# Altium PCB Rackmount_DSP.PcbDoc (part 13 of 24)
Units mil, origin at the board's own origin, x right, y up, seen from the top; angles counter-clockwise.
Board outline 10629.92 x 8267.72 mil, 4 copper layers (Top Layer, Mid Layer 1, Mid Layer 2, Bottom Layer), stack 36.2 mil thick; 4500 components, 1565 nets, 9765 pads, 3289 vias.
Unrouted connection lines stored in the file: 1.
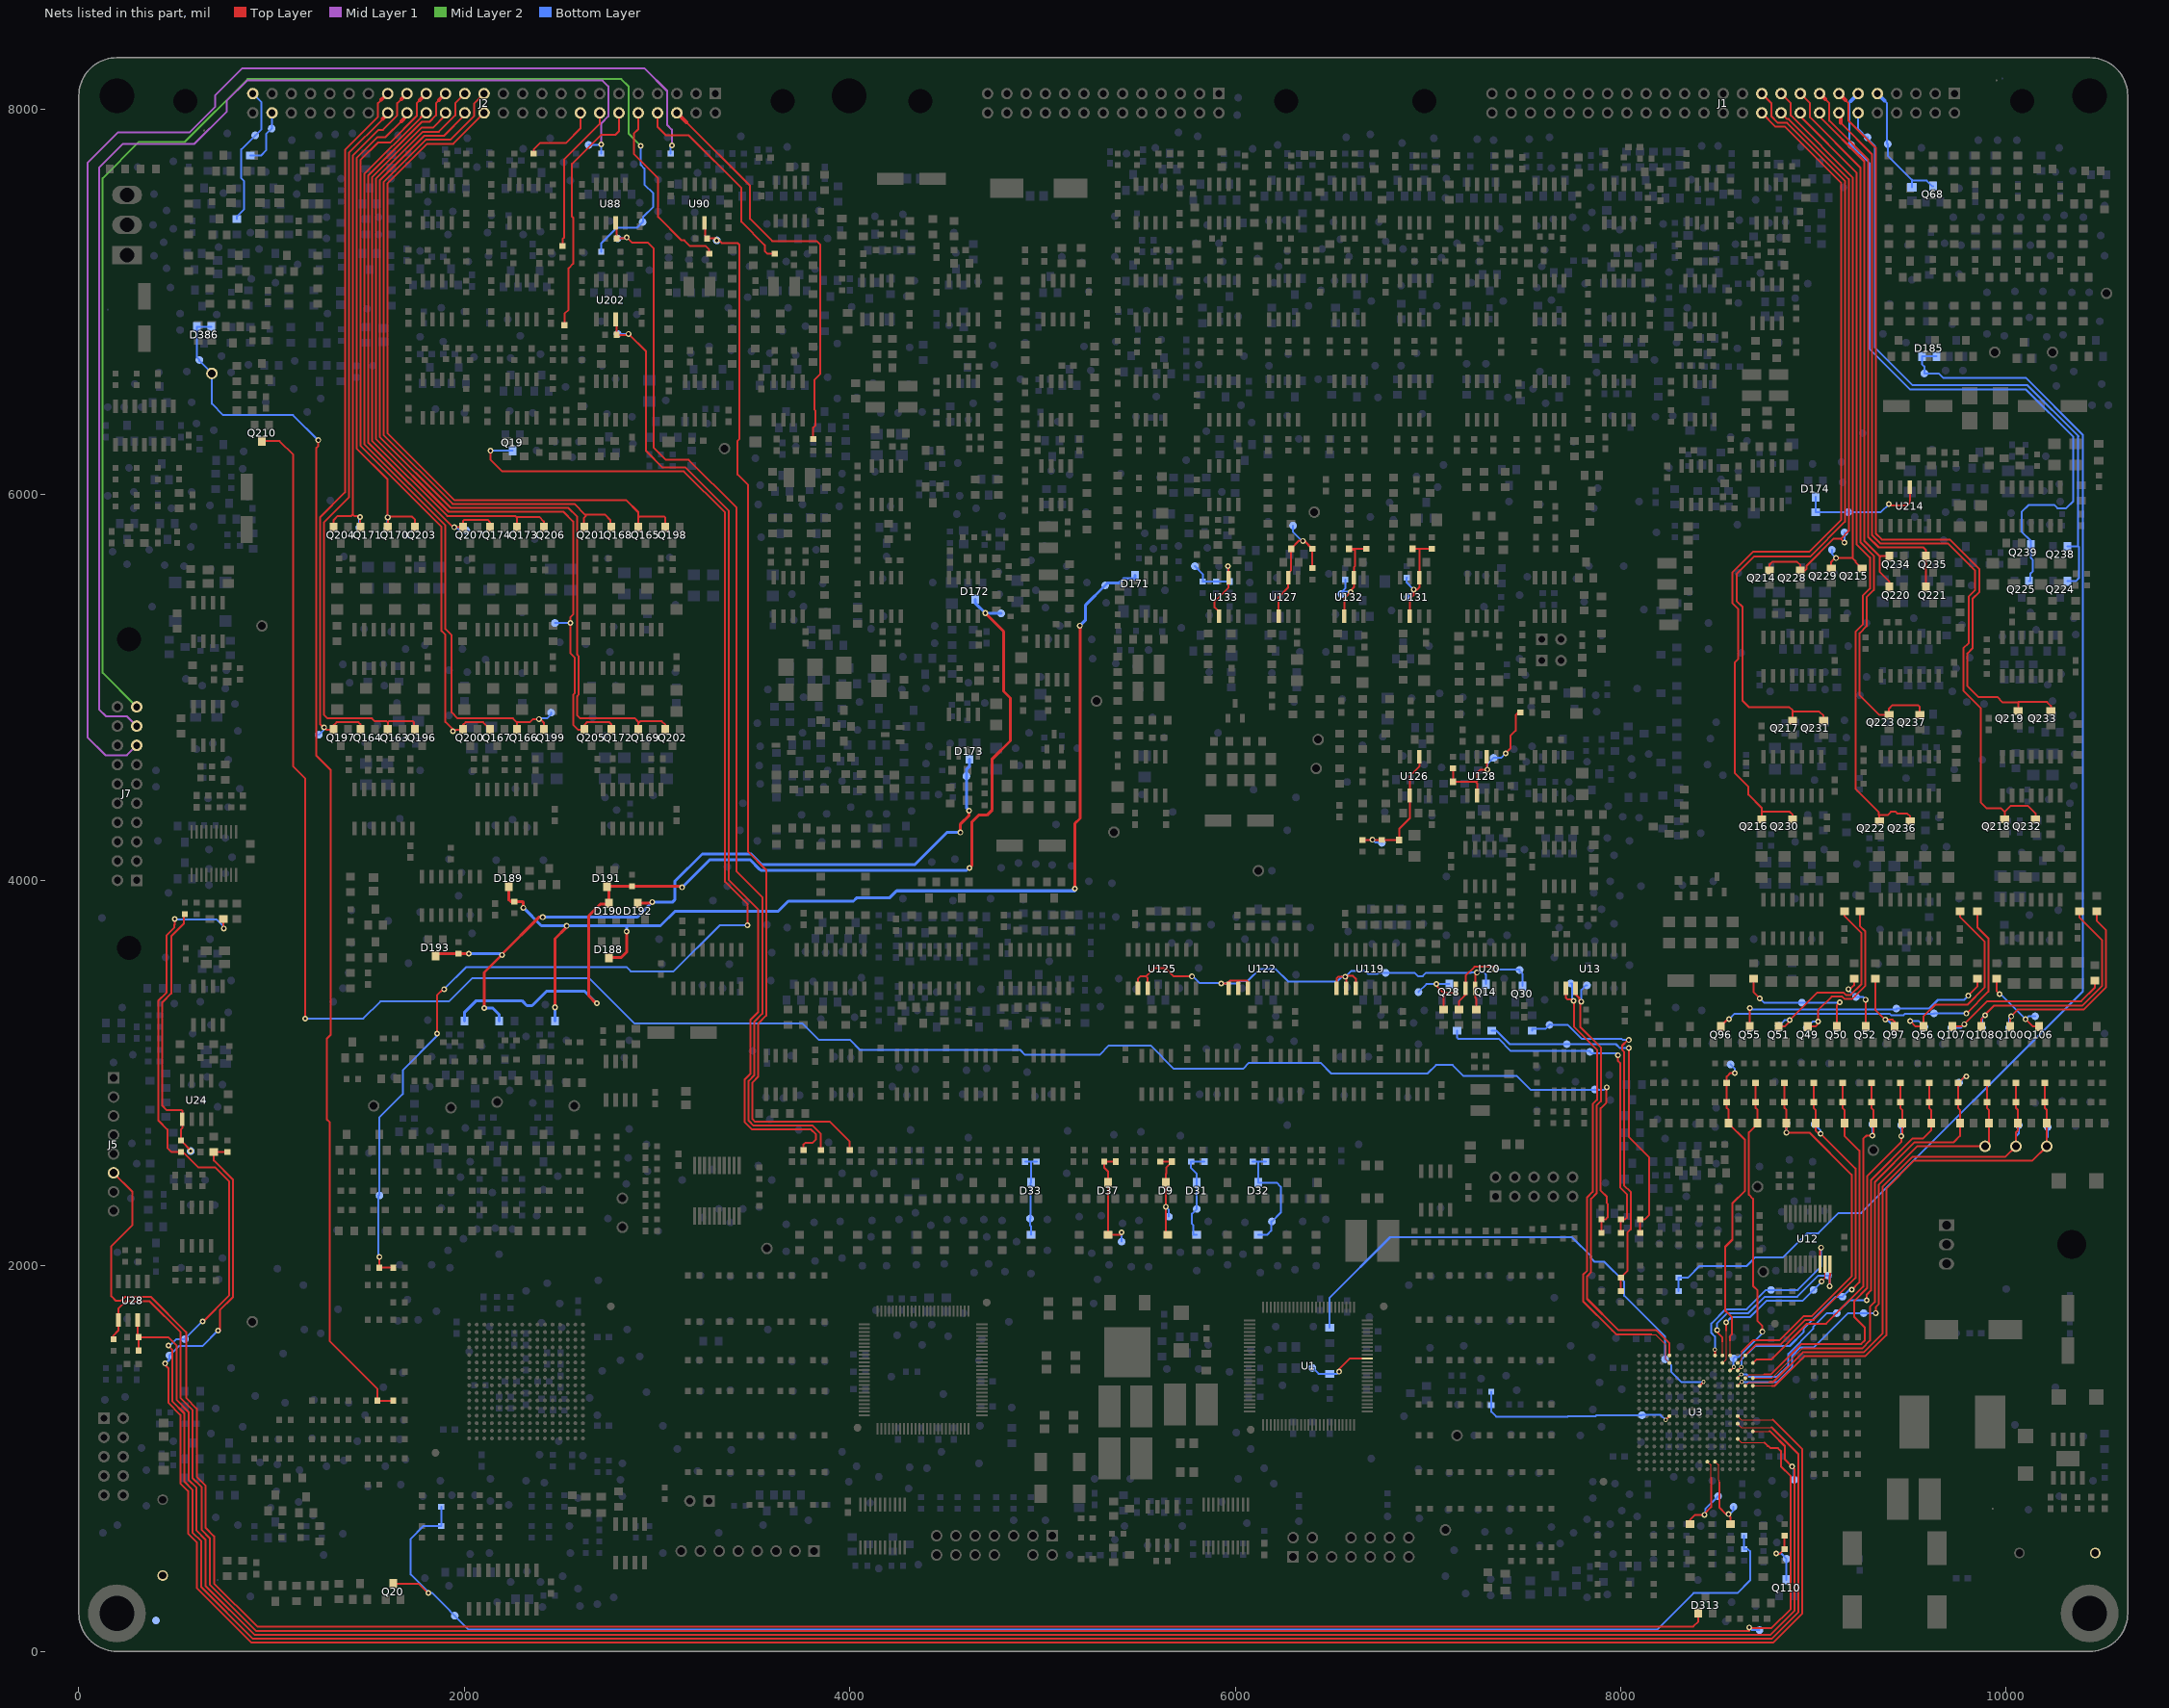
[diagram p15: the nets of this part, all layers, seen from the top]

## Via types
v1: diameter 30, hole 16, Top Layer to Bottom Layer, 3143 vias
v2: diameter 22, hole 12, Top Layer to Bottom Layer, 146 vias

## Nets (pads, with @x,y where several pads share a name; then routed paths per layer and width w, separated by ;. In a path a pad name is that pad's centre, name@x,y a point inside that pad or via, vN(x,y) a via of type N, cw(c..) or ccw(c..) an arc to the next point about the centre after c; other vN are vias at no path point) (continued)
N_VOut_A: J2.12 R826.1 TP666.1 | length 1270.9
  Top Layer w10: R826.1@2520,6880 2520,6938.94 2540.8,6959.75 2540.8,7175.72 2564.25,7199.17 2564.25,7437.22 2558.41,7443.06 2558.41,7716.97 2710.36,7868.92 2785.03,7868.92 2802.36,7886.25 J2.12@2802.36,7975.02
  Top Layer w20: J2.12@2802.36,7975.02 J2.12@2802.36,7981.5
  Bottom Layer w10: TP666.1@2800,7980 2800,7981.5 J2.12@2802.36,7981.5
N_VOut_A_DC: J2.6 R860.1 TP667.1 | length 2159.5
  Top Layer w10: 3152.57,7932.06 3153.02,7932.06 3482.14,7602.93 3482.14,7431.14 3597.01,7316.27 3827.44,7316.27 3847.5,7296.21 3847.5,6627.63 3817.02,6597.15 3817.02,6440.95 3822.42,6435.55 3822.42,6360.62 3810,6348.21 R860.1@3810,6290
  Top Layer w20: J2.6@3102.36,7981.5 3152.57,7932.06
  Bottom Layer w10: TP667.1@3100,7980 3100,7981.5 J2.6@3102.36,7981.5
N_VOut_B: J2.14 R828.1 TP668.1 | length 780
  Top Layer w10: R828.1@2510,7290 2510,7326.78 2517.14,7333.92 2517.14,7738.19 2702.36,7923.41 J2.14@2702.36,7981.5
  Bottom Layer w10: TP668.1@2700,7975 2700,7981.5 J2.14@2702.36,7981.5
N_VOut_B_DC: J2.8 R861.1 TP669.1 | length 1077.2
  Top Layer w10: J2.8@3002.36,7981.5 3002.36,7908.79 3045.94,7865.21 3163.29,7865.21 3437.49,7591.02 3437.49,7416.66 3558.73,7295.42 3558.73,7264.7 3573.43,7250 R861.1@3610,7250
  Bottom Layer w10: TP669.1@3000,7980 3000,7981.5 J2.8@3002.36,7981.5
N_VOut_C: J2.16 R830.1 TP670.1 | length 399
  Top Layer w10: R830.1@2360,7770 2360,7790.77 2395,7825.77 2528.04,7825.77 2602.36,7900.09 J2.16@2602.36,7981.5
  Bottom Layer w10: J2.16@2602.36,7981.5 2605,7981.5 TP670.1@2605,7975
N_VOut_C_DC: J2.10 R854.1 TP671.1 | length 963
  Top Layer w10: J2.10@2902.36,7981.5 2902.36,7896.03 2879.39,7873.06 2879.39,7768.37 3005.45,7642.31 3005.45,7441.6 3127.04,7320 3141.96,7320 3171.71,7290.25 3252.89,7290.25 3270,7273.15 R854.1@3270,7250
  Bottom Layer w10: TP671.1@2900,7980 2900,7981.5 J2.10@2902.36,7981.5
OTHERS_BAT_START_EN: D185.1 D185.2 R739.1 R1018.1 TP252.1 | length 6792.4
  Bottom Layer w10: R1018.1@8300,1870 R739.1@8300,1940 8349.69,1940 8409.26,1999.57 8654,1999.57 8698.64,2044.21 8841.98,2044.21 8967.09,2169.32 9025.22,2169.32 9129.83,2273.93 9248.06,2273.93 10397.37,3423.24 10397.37,6310.57 10100.97,6606.97 9672.58,6606.97 9649.55,6630 TP252.1@9575,6630 9575,6666.25 9562.5,6678.75 D185.2@9562.5,6718.5 D185.1@9637.5,6718.5
OTHERS_BAT_START_EN_O: C1177.1 J1.9 Q68.3 TP251.1 | length 683.9
  Bottom Layer w10: 9369.07,8043.92 9381.69,8031.3 9381.69,7820 TP251.1@9385,7820 9385,7760 9510,7635 9510,7629.3 ; C1177.1@9510,7595 9510,7629.3 ; Q68.3@9620,7601.5 9615,7601.5 9587.2,7629.3 9510,7629.3
  Bottom Layer w20: J1.9@9331.5,8081.5 9369.07,8043.92
OUT_CROSS_ZERO_HW: Q19.3 R727.2 R1037.2 TP250.1 | length 7082.5
  Top Layer w10: v1(1560,2046.9) R727.2@1560,1990 R1037.2@1630,1990 ; v1(1858.29,3205.39) 1858.29,3403.42 1892.07,3437.2 v1(1895.2,3434.07) ; v1(2135.12,6228.5) 2135.12,6182.67 2196.74,6121.06 3139.45,6121.06 3352.41,5908.1 3352.41,3992.41 3469.61,3875.21 3469.61,3766.39 v1(3468.44,3766.39)
  Bottom Layer w10: v1(1560,2046.9) 1555,2046.9 1555,2365 TP250.1@1560,2365 1560,2770.9 1680.42,2891.32 1680.42,3014.66 1858.29,3192.53 v1(1858.29,3205.39) ; v1(1895.2,3434.07) 1895.2,3435 2010.72,3550.53 2840.95,3550.53 2863.6,3527.88 3085.93,3527.88 3324.44,3766.39 v1(3468.44,3766.39) ; v1(2135.12,6228.5) Q19.3@2250,6228.5
OUT_I_A: J7.15 R1599.1 TP672.1 | length 6930.9
  Mid Layer 1 w10: J7.15@300,4700 249.09,4649.09 137.61,4649.09 44.56,4742.13 44.56,7721.2 204.02,7880.66 575.04,7880.66 706.25,8011.86 706.25,8071.12 846.63,8211.5 2935.99,8211.5 3052.36,8095.14 3052.36,7919.15 3076.64,7894.87 v1(3076.64,7813)
  Bottom Layer w10: J7.15@300,4700 TP672.1@305,4700 ; R1599.1@3070,7770 3070,7806.36 v1(3076.64,7813)
OUT_I_A_I: R922.1 R2518.2 TP673.1 U90.7 | length 5506.1
  Top Layer w10: U90.7@3245,7410 3248.89,7410 3248.89,7341.02 3259.91,7330 R2518.2@3260,7330 3307.78,7330 v1@3313.51,7324.26 ; v1(3310,7320) 3313.51,7320 v1@3313.51,7324.26 ; 3417.67,6279.91 3428.09,6290.32 3428.09,7295.68 3416.88,7306.89 3334.9,7306.89 3317.53,7324.26 v1@3313.51,7324.26 ; 3417.68,6279.91 3417.68,6105.07 3472.41,6050.34 3472.41,4147.84 3566.09,4054.16 3566.09,3298.48 3524.29,3256.67 3524.29,2980.46 3495,2951.17 3495,2761.29 3508.75,2747.54 3896.97,2747.54 4000,2644.51 R922.1@4000,2600
OUT_I_B: J7.17 R1600.1 TP675.1 | length 6345.8
  Mid Layer 1 w10: J7.17@300,4800 250,4850 142.6,4850 104.56,4888.03 104.56,7696.34 228.87,7820.66 599.89,7820.66 766.25,7987.01 766.25,8009.02 766.25,8043.08 872.91,8149.74 2716.47,8149.74 2747.36,8118.85 2747.36,8100.14 2747.36,7962.86 2710,7925.49 v1(2710,7818.24)
  Bottom Layer w10: TP675.1@2645,7815 v1@2710,7815 ; R1600.1@2710,7770 v1@2710,7815 ; v1(2710,7818.24) v1@2710,7815
OUT_I_B_I: R923.1 R2519.2 TP676.1 U88.7 | length 5700.8
  Top Layer w10: U88.7@2785,7410 2790,7405 R2519.2@2790,7330 2843.18,7330 v1(2843.18,7334.63) 2870.67,7307.14 2953.27,7307.14 2982.5,7277.91 2982.5,6244 3045.44,6181.06 3164.3,6181.06 3412.41,5932.95 3412.41,4045.55 3545.96,3911.99 3545.96,3308.07 3504.29,3266.4 3504.29,2988.74 3475,2959.46 3475,2753 3500.46,2727.54 3807.16,2727.54 3850,2684.7 R923.1@3850,2600
  Bottom Layer w10: TP676.1@2795,7330 2843.18,7330 v1(2843.18,7334.63)
OUT_I_C: J7.19 R1601.1 TP677.1 | length 6859.9
  Mid Layer 2 w10: J7.19@300,4900 123.21,5076.79 123.21,7642.58 311.95,7831.32 549.7,7831.32 875,8156.62 2814.84,8156.62 2852.36,8119.1 2852.36,8095.14 2852.36,7872.96 v1(2915.19,7810.13)
  Bottom Layer w10: R1601.1@2710,7260 2710,7305.03 2790.01,7385.04 2895.04,7385.04 TP677.1@2925,7415 2926.94,7415 2928.36,7416.42 2928.36,7443.19 2980,7494.82 2980,7563.35 2934.06,7609.29 2934.06,7692.05 2915.19,7710.92 v1(2915.19,7810.13)
OUT_I_C_I: R924.1 R2516.2 TP678.1 U202.7 | length 5196.9
  Top Layer w10: U202.7@2785,6910 2790,6905 R2516.2@2790,6830 2846.67,6830 v1(2851.67,6835) 2942.42,6744.25 2942.42,6227.52 3028.87,6141.06 3147.73,6141.06 3372.41,5916.39 3372.41,4000.69 3525.16,3847.94 3525.16,3317.4 3484.29,3276.53 3484.29,2997.03 3455,2967.74 3455,2744.72 3492.18,2707.54 3798.88,2707.54 3824.71,2681.7 3824.71,2656.85 3807.14,2639.28 3769.28,2639.28 3760,2630 R924.1@3760,2600
  Bottom Layer w10: TP678.1@2795,6835 v1(2851.67,6835)
OUT_RELAY_DRV: D386.1 D386.2 R1047.2 R2522.2 TP35.1 TP249.1 | length 6352.4
  Top Layer w10: v1(1242.42,6283.51) 1242.42,6253.51 1232.42,6243.51 1232.42,4646.05 1306.48,4571.99 1306.48,3197.82 1286.57,3177.91 1286.57,2760.15 1301.05,2745.66 1301.05,1610.15 1550,1361.2 R2522.2@1550,1300 R1047.2@1630,1300
  Bottom Layer w10: D386.2@687.5,6871.5 D386.1@612.5,6871.5 612.5,6713.49 625,6700.99 TP249.1@625,6700 625,6695 TP35.1@690,6630 690,6472.73 748.88,6413.85 1111.29,6413.85 1241.62,6283.51 v1(1242.42,6283.51)
OUT_RELAY_DRV_O: J2.48 R2501.2 TP248.1 | length 299.9
  Bottom Layer w10: R2501.2@890,7760 944.32,7760 971.55,7787.23 971.55,7871.56 TP248.1@1000,7900 1002.36,7902.36 J2.48@1002.36,7981.5
PGND: C1142.2 C1143.2 TP1867.1
POWER_FAULT: J2.49 R965.1 TP247.1 | length 735.3
  Bottom Layer w10: R965.1@820,7430 820,7444.9 857.5,7482.4 857.5,7627.5 842.5,7642.5 842.5,7792.5 TP247.1@915,7865 947.36,7897.36 947.36,8036.5 J2.49@902.36,8081.5
POWER_FAULT_I: Q210.3 R732.1 R1012.2 TP1590.1 | length 11138.9
  Top Layer w10: Q210.3@950,6278.5 1041.48,6278.5 1112.42,6207.55 1112.42,4590.91 1173.66,4529.67 v1(1173.66,3283.11) ; R1012.2@7900,2170 R732.1@7900,2240 7919.97,2240 7932.06,2252.09 7932.06,2321.83 7927.6,2326.28 7927.6,2358.49 7895.62,2390.48 7895.62,2817.2 7925.64,2847.21 7925.64,2923.79 7927.26,2925.41 v1(7927.26,2926.07)
  Bottom Layer w10: v1(1173.66,3283.11) 1475.45,3283.11 1564.09,3371.75 1920.39,3371.75 2040.25,3491.62 2648.16,3491.62 2882.88,3256.9 3754.31,3256.9 3837.83,3173.39 4000,3173.39 4053.26,3120.13 4883.11,3120.13 4908.68,3094.56 5295.5,3094.56 5344.26,3143.32 5560.19,3143.32 5681.21,3022.3 6040.15,3022.3 6071.24,3053.39 6442.1,3053.39 6497.73,2997.76 6997.6,2997.76 7041.57,3041.73 7127.95,3041.73 7184.93,2984.75 7460.8,2984.75 7531.68,2913.88 TP1590.1@7865,2913.88 ; TP1590.1@7865,2915 TP1590.1@7865,2913.88 ; v1(7927.26,2926.07) 7924.96,2926.07 7912.77,2913.88 TP1590.1@7865,2913.88
POWER_OK: Q20.3 R703.2 R731.1 R1011.2 R1038.2 TP245.1 | length 8108.4
  Top Layer w10: Q20.3@1630,351.5 1762.58,351.5 1811.42,302.66 v1(1813.5,302.66)
  Bottom Layer w10: R1038.2@1880,750 R703.2@1880,650 1787.53,650 1721.4,583.86 1721.4,398.43 1813.5,306.32 v1(1813.5,302.66) 1833.72,302.66 1925.25,211.14 1925.25,209.75 TP245.1@1950,185 2022.21,112.79 8187.86,112.79 8377.8,302.73 8605.76,302.73 8671,367.97 8671,519.21 8660.21,530 R731.1@8640,530 R1011.2@8640,600
PROTEC_REFA1: C547.1 R2067.2 R2292.1 TP1594.1 U132.2 U132.6 | length 632.4
  Top Layer w10: U132.6@6565,5370 6565,5461.59 v1(6599.05,5495.64) 6594.12,5495.64 6594.12,5499.12 6615,5520 U132.2@6615,5570 6615,5623.95 6622.17,5631.12 6622.17,5714.93 6621,5716.1 6590,5716.1 C547.1@6590,5720 R2292.1@6680,5720
  Bottom Layer w10: TP1594.1@6550,5485 6550,5494.5 TP1594.1@6552.65,5497.14 ; R2067.2@6570,5560 6570,5514.5 TP1594.1@6552.65,5497.14 ; v1(6599.05,5495.64) 6595.62,5495.64 6594.12,5497.14 TP1594.1@6552.65,5497.14
PROTEC_REFA2: C529.1 R2064.2 R2293.1 TP680.1 U127.2 U127.6 | length 727.1
  Top Layer w10: U127.6@6225,5370 6225,5470 6275,5520 U127.2@6275,5570 6275,5593.5 6290,5608.5 C529.1@6290,5720 6290,5721.5 6330.8,5762.3 v1@6350.3,5762.3 ; v1(6350.3,5760.88) v1@6350.3,5762.3 ; R2064.2@6400,5620 R2293.1@6400,5720 6399,5720 6356.7,5762.3 v1@6350.3,5762.3
  Bottom Layer w10: TP680.1@6300,5840 6300,5806.24 6345.35,5760.88 v1(6350.3,5760.88)
PROTEC_REFB1: C549.1 R2063.2 R2288.1 TP1595.1 U128.2 U128.6 | length 834.4
  Top Layer w10: R2288.1@7130,4580 C549.1@7130,4510 7247.93,4510 ; U128.6@7255,4440 7255,4502.93 7247.93,4510 ; U128.2@7305,4640 v1@7305,4574.43 ; v1(7307.5,4574.43) v1@7305,4574.43 ; v1(7402.39,4658.97) 7426.82,4683.41 7426.82,4749.45 7454.15,4776.78 7454.15,4857.67 7466.48,4870 R2063.2@7480,4870 ; 7247.93,4510 7247.93,4510.11 7254.89,4517.07 7254.89,4558.45 7270.88,4574.43 v1@7305,4574.43
  Bottom Layer w10: v1(7307.5,4574.43) 7307.5,4602.5 TP1595.1@7340,4635 7378.41,4635 v1(7402.39,4658.97)
PROTEC_REFB2: C531.1 R2065.2 R2291.1 TP682.1 U131.2 U131.6 | length 610.9
  Top Layer w10: U131.6@6905,5370 6905,5458.33 6925.48,5478.81 v1(6925.48,5508.81) 6943.81,5508.81 6955,5520 U131.2@6955,5570 6955,5720 ; C531.1@6920,5720 6955,5720 ; R2291.1@7020,5720 6955,5720
  Bottom Layer w10: R2065.2@6890,5570 6888.46,5570 6888.46,5545.84 v1(6925.48,5508.81) 6925.48,5500.48 TP682.1@6895,5470
PROTEC_REFC1: C548.1 R2068.2 R2287.1 TP1596.1 U133.2 U133.6 | length 622.1
  Top Layer w10: U133.6@5915,5370 5915,5393.5 5892.89,5415.61 5892.89,5445.93 5965,5518.04 U133.2@5965,5570 5965,5627.05 v1(5961.53,5630.51)
  Bottom Layer w10: TP1596.1@5790,5630 5831.32,5588.68 R2068.2@5831.32,5550 ; R2068.2@5830,5550 R2068.2@5831.32,5550 ; v1(5961.53,5630.51) 5961.53,5595.74 5970,5587.27 C548.1@5970,5550 R2287.1@5900,5550 R2068.2@5831.32,5550
PROTEC_REFC2: C530.1 R2066.2 R2290.1 TP684.1 U126.2 U126.6 | length 719.9
  Top Layer w10: R2066.2@6660,4210 6703.14,4210 6703.69,4210.55 v1(6711.98,4210.55) 6712.53,4210 R2290.1@6760,4210 C530.1@6850,4210 6850,4266.29 6905,4321.29 U126.6@6905,4440 6905,4540 6955,4590 U126.2@6955,4640
  Bottom Layer w10: v1(6711.98,4210.55) 6725,4197.53 6760,4197.53 TP684.1@6760,4195
PROTECT_chg: D174.3 R1839.2 TP241.1 U214.4 | length 675.3
  Top Layer w10: v1(9391.02,5951.5) 9397.77,5944.75 9485.66,5944.75 9500,5959.09 U214.4@9500,6040
  Bottom Layer w10: D174.3@9010,5988.5 R1839.2@9010,5910 TP241.1@9180,5910 9349.52,5910 v1(9391.02,5951.5)
PROTECTA: D171.3 D188.3 D189.3 R2356.1 R2537.1 TP1753.1 | length 5752.1
  Top Layer w15: D189.3@2230,3968.5 2230,3900.37 2240.37,3890 R2356.1@2260,3890 2301.34,3890 2306.39,3884.95 v1(2306.39,3857.73) ; v1(2470,3341.11) 2470,3697.39 2528.54,3755.93 2531.39,3755.93 v1(2531.39,3763.38) ; D188.3@2750,3598.5 2812.67,3598.5 2841.46,3627.28 v1(2841.46,3735.17) ; v1(5167.29,3956.06) 5168.01,3956.78 5168.01,4294.52 5194.66,4321.16 5194.66,5321.47 v1(5193.7,5321.47)
  Bottom Layer w15: v1(2306.39,3857.73) 2399.48,3764.64 v1@2531.39,3764.64 ; R2537.1@2470,3270 v1(2470,3341.11) ; v1(2531.39,3763.38) v1@2531.39,3764.64 ; v1(2841.46,3735.17) 2841.46,3764.64 ; v1(5167.29,3956.06) 5167.29,3945.49 4242.5,3945.49 4205.32,3908.31 4035.01,3908.31 4018.76,3892.06 3680.45,3892.06 3628.25,3839.86 3092.99,3839.86 3017.76,3764.64 2841.46,3764.64 ; v1(5193.7,5321.47) 5223.55,5351.32 5223.55,5428.55 TP1753.1@5325,5530 5325,5530.34 5337.89,5543.24 5398.71,5543.24 5420.98,5565.5 5480,5565.5 D171.3@5480,5581.5 ; v1@2531.39,3764.64 2841.46,3764.64
PROTECTB: D172.3 D190.3 D191.3 R1946.1 R2538.1 TP1752.1 | length 5156
  Top Layer w15: v1(2687.29,3361.63) 2683.81,3361.63 2644.9,3400.54 2644.9,3815.56 2704.96,3875.62 2744.12,3875.62 D190.3@2750,3881.5 D191.3@2750,3968.5 ; D191.3@2740,3968.5 D191.3@2750,3968.5 ; R1946.1@2870,3970 R1946.1@2870,3968.5 ; v1(3129.93,3963.32) 3124.76,3968.5 R1946.1@2870,3968.5 ; v1(4621.3,4063.59) 4633.1,4075.39 4633.1,4302.9 4668.04,4337.84 4711.66,4337.84 4739.15,4365.33 4739.15,4630.26 4832.77,4723.88 4832.77,4946.09 4797.89,4980.97 4797.89,5291.6 v1(4702.97,5386.52) ; D191.3@2750,3968.5 R1946.1@2870,3968.5
  Bottom Layer w15: R2538.1@2000,3270 2000,3313.86 2061.66,3375.52 2299.16,3375.52 2324.92,3349.76 2351.69,3349.76 2425.88,3423.95 2624.98,3423.95 v1(2687.29,3361.63) ; v1(3129.93,3963.32) 3274.11,4107.5 3481.44,4107.5 3530.9,4058.04 3531.88,4058.04 3538.21,4051.71 4605.61,4051.71 4617.48,4063.59 v1(4621.3,4063.59) ; D172.3@4650,5458.5 4650,5439.49 v1(4702.97,5386.52) 4704.49,5385 TP1752.1@4785,5385
PROTECTC: D173.3 D192.3 D193.3 R2355.1 R2539.1 TP1593.1 | length 4037.9
  Top Layer w15: D193.3@1850,3608.5 1850,3618.86 1968.86,3618.86 R2355.1@1970,3620 2023.96,3620 v1(2023.96,3620.29) ; v1(2103.39,3336.7) 2103.39,3522.18 2190.34,3609.13 2195.4,3609.13 v1(2195.4,3612.95) 2195.4,3617.63 2386.13,3808.35 v1(2406.66,3808.35) ; D192.3@2900,3881.5 2968.97,3881.5 v1(2975.16,3887.69) ; v1(4574.38,4248.1) 4574.38,4292.18 4619,4336.8 v1(4619,4361.03)
  Bottom Layer w15: v1(2023.96,3620.29) 2023.96,3620 2187.9,3620 2195.4,3612.5 v1(2195.4,3612.95) ; v1(2103.39,3336.7) 2147.91,3336.7 2180,3304.61 R2539.1@2180,3270 ; v1(2406.66,3808.35) 2895.83,3808.35 v1(2975.16,3887.69) 3081.04,3887.69 3091.61,3898.26 3091.61,3993.75 3234.37,4136.52 3488.76,4136.52 3544.63,4080.64 4335.46,4080.64 4502.92,4248.1 v1(4574.38,4248.1) ; v1(4619,4361.03) 4619,4363.34 4605,4377.34 TP1593.1@4605,4540 4605,4575 4620,4590 D173.3@4620,4628.5
PWM_1REC_GB1S: J1.11 Q225.2 Q239.2 TP258.1 | length 3672.3
  Bottom Layer w10: 9193.06,8043.06 9186.5,8036.5 9186.5,7819.59 9193.04,7813.04 TP258.1@9195,7815 9291.67,7718.33 9291.67,6755.24 9501.43,6545.49 10102.51,6545.49 10348.37,6299.63 10348.37,5967.29 10311.08,5930 10265.5,5930 10247.88,5947.62 10117.46,5947.62 10079.83,5909.98 10079.83,5809.62 10127.5,5761.95 Q239.2@10127.5,5741.5 10127.5,5673.01 10138.36,5662.15 10138.36,5604.12 10124.24,5590 10124.24,5551.5 Q225.2@10117.5,5551.5
  Bottom Layer w20: 9193.06,8043.06 J1.11@9231.5,8081.5
PWM_1REC_GB2S: J1.13 Q219.2 Q233.2 TP1763.1 | length 4163.9
  Top Layer w10: 9165.67,8047.32 9181.5,8031.5 9181.5,7940.1 9323.5,7798.09 9323.5,5798.79 9354.21,5768.07 9705.98,5768.07 9860.59,5613.47 9860.59,5496.72 9825.48,5461.61 9825.48,5204.56 9798.11,5177.19 9798.11,5007.88 9854.84,4951.15 9953.23,4951.15 9980,4924.38 10061.5,4924.38 ; Q219.2@10061.5,4877.5 10061.5,4924.38 ; Q233.2@10231.5,4877.5 10231.5,4905.61 10211.72,4925.39 10061.5,4925.39 10061.5,4924.38
  Top Layer w20: J1.13@9131.5,8081.5 9165.67,8047.32
  Bottom Layer w10: TP1763.1@9130,8085 9130,8082.99 J1.13@9131.5,8081.5
PWM_1REC_GB3S: J1.15 Q221.2 Q235.2 TP1764.1 | length 2932
  Top Layer w10: 9060.05,8052.94 9081.5,8031.5 9081.5,7940.57 9283.5,7738.57 9283.5,5782.22 9338.35,5727.37 9570.19,5727.37 9582.5,5715.06 Q235.2@9582.5,5681.5 Q221.2@9582.5,5521.5
  Top Layer w20: J1.15@9031.5,8081.5 9060.05,8052.94
  Bottom Layer w10: J1.15@9031.5,8081.5 9035,8077.99 TP1764.1@9035,8075
PWM_1REC_GH1S: J1.12 Q224.2 Q238.2 TP256.1 | length 3370
  Bottom Layer w10: J1.12@9231.5,7981.5 9231.5,7898.4 9277.45,7852.45 TP256.1@9280,7855 9280,7848.5 9317.73,7810.77 9317.73,6765.17 9512.67,6570.23 10107.56,6570.23 10375.57,6302.22 10373.09,6302.22 10373.09,6251.43 10373.34,6251.43 10373.34,5737.58 10367.26,5731.5 ; Q224.2@10317.5,5551.5 10360.16,5551.5 10376.41,5567.75 10376.41,5729.75 10374.66,5731.5 10367.26,5731.5 ; Q238.2@10317.5,5731.5 10367.26,5731.5
PWM_1REC_GH2S: J1.14 Q218.2 Q232.2 TP1765.1 | length 4545.9
  Top Layer w10: 9140.29,7930.63 9303.5,7767.42 9303.5,5790.5 9345.93,5748.07 9696.17,5748.07 9838.94,5605.3 9838.94,5506.18 9804.79,5472.03 9804.79,5230.25 9777.75,5203.21 9777.75,4983.37 9867.08,4894.03 9867.08,4404.93 9897.5,4374.52 9972.04,4374.52 9991.5,4355.05 ; Q218.2@9991.5,4317.5 9991.5,4355.05 ; Q232.2@10151.5,4317.5 10151.5,4347.26 10113.29,4385.47 10021.92,4385.47 9991.5,4355.05
  Top Layer w20: J1.14@9131.5,7981.5 9140.29,7972.7 9140.29,7930.63
  Bottom Layer w10: TP1765.1@9125,7985 9128.5,7981.5 J1.14@9131.5,7981.5
PWM_1REC_GH3S: J1.16 Q220.2 Q234.2 TP254.1 | length 2663.7
  Top Layer w10: J1.16@9031.5,7981.5 9031.5,7962.29 9263.32,7730.46 9263.32,5761.5 9343.32,5681.5 9348.63,5681.5 ; Q220.2@9392.5,5521.5 9392.5,5550.84 9343.56,5599.79 9343.56,5676.43 9348.63,5681.5 ; Q234.2@9392.5,5681.5 9348.63,5681.5
  Bottom Layer w10: TP254.1@9030,7980 9030,7981.5 J1.16@9031.5,7981.5
PWM_2REC_GB1S: J1.17 Q223.2 Q237.2 TP1766.1 | length 3754.3
  Top Layer w10: J1.17@8931.5,8081.5 8981.5,8031.5 8981.5,7958.41 9243.32,7696.58 9243.32,5752.77 9313.13,5682.96 9313.13,5506.03 9275.32,5468.22 9275.32,5318.64 9239,5282.32 9239,4960.48 9341.98,4857.5 Q223.2@9391.5,4857.5 9391.5,4890.7 9410,4909.21 9542.35,4909.21 9551.5,4900.05 Q237.2@9551.5,4857.5
  Bottom Layer w10: TP1766.1@8930,8080 J1.17@8931.5,8081.5
PWM_2REC_GB2S: J1.19 Q215.2 Q229.2 TP698.1 | length 2845.4
  Top Layer w10: J1.19@8831.5,8081.5 8881.5,8031.5 8881.5,7967.86 9203.32,7646.03 9203.32,5671.29 ; Q229.2@9091.5,5617.5 9091.5,5652.5 9110.29,5671.29 v1(9116.99,5671.29) 9203.32,5671.29 ; Q215.2@9251.5,5617.5 9217.68,5651.32 9217.68,5656.93 9203.32,5671.29
  Bottom Layer w10: TP698.1@9095,5715 9095,5693.29 v1(9116.99,5671.29)
PWM_2REC_GB3S: J1.21 Q217.2 Q231.2 TP699.1 | length 4305.5
  Top Layer w10: J1.21@8731.5,8081.5 8781.5,8031.5 8781.5,7963.56 8815.38,7929.68 8862.66,7929.68 9163.32,7629.02 9163.32,5860.32 8983.89,5680.88 8693.45,5680.88 8601.45,5588.88 8601.45,5450.05 8631.65,5419.85 8631.65,4931.44 8664.04,4899.04 8873.56,4899.04 8891.5,4881.1 8891.5,4875.36 ; Q217.2@8891.5,4827.5 8891.5,4875.36 ; Q231.2@9051.5,4827.5 9051.5,4853.52 9029.66,4875.36 8891.5,4875.36
  Bottom Layer w10: TP699.1@8730,8085 8730,8082.99 J1.21@8731.5,8081.5
PWM_2REC_GH1S: J1.18 Q222.2 Q236.2 TP1767.1 | length 4112.5
  Top Layer w10: J1.18@8931.5,7981.5 8931.5,7962.65 9223.32,7670.83 9223.32,5743.89 9292.49,5674.72 9292.49,5513.7 9254.82,5476.03 9254.82,5326.6 9219,5290.78 9219,4473.28 9337.44,4354.83 9337.44,4338.11 9341.5,4338.11 9341.5,4337.84 ; Q222.2@9341.5,4307.5 9341.5,4337.84 ; Q236.2@9501.5,4307.5 9501.5,4331.58 9486.91,4346.17 9435.91,4346.17 9426.56,4355.51 9401.71,4355.51 9384.04,4337.84 9341.5,4337.84
  Bottom Layer w10: TP1767.1@8930,7985 8930,7982.99 J1.18@8931.5,7981.5
PWM_2REC_GH2S: J1.20 Q214.2 Q228.2 TP460.1 | length 2974.1
  Top Layer w10: Q214.2@8771.5,5607.5 8771.5,5637.39 8786.03,5651.92 8914.9,5651.92 8931.5,5635.32 Q228.2@8931.5,5607.5 8955.71,5607.5 8963.96,5615.74 8963.96,5632.44 9103.13,5771.62 9141.36,5771.62 ; J1.20@8831.5,7981.5 8863.32,7949.68 8870.95,7949.68 9183.32,7637.3 9183.32,5813.57 9141.36,5771.62 ; v1(9160,5752.98) 9141.36,5771.62
  Bottom Layer w10: v1(9160,5752.98) TP460.1@9160,5805
PWM_2REC_GH3S: J1.22 Q216.2 Q230.2 TP1768.1 | length 4541.6
  Top Layer w10: Q216.2@8731.5,4317.5 8731.5,4356.14 ; J1.22@8731.5,7981.5 8803.32,7909.68 8852.44,7909.68 9143.32,7618.79 9143.32,5869 8978.06,5703.75 8685.56,5703.75 8578.63,5596.82 8578.63,5439.06 8610.24,5407.46 8610.24,5148.87 8591.13,5129.77 8591.13,4556.42 8662.71,4484.84 8662.71,4444.84 8731.5,4376.05 8731.5,4356.14 ; Q230.2@8891.5,4317.5 8891.5,4340.91 8876.27,4356.14 8731.5,4356.14
  Bottom Layer w10: TP1768.1@8730,7985 8730,7982.99 J1.22@8731.5,7981.5
PWM_INV_G1_A: J2.26 Q165.2 Q198.2 TP685.1 | length 3700.1
  Top Layer w10: J2.26@2102.36,7981.5 1942.18,7821.31 1808.14,7821.31 1600.88,7614.05 1600.88,6320.13 1948.05,5972.96 2839.41,5972.96 2902.5,5909.87 2902.5,5882.21 ; Q165.2@2902.5,5831.5 2902.5,5882.21 ; Q198.2@3042.5,5831.5 3042.5,5880.21 3035.43,5887.28 2907.56,5887.28 2902.5,5882.21
  Bottom Layer w10: TP685.1@2100,7975 2100,7981.5 J2.26@2102.36,7981.5
PWM_INV_G1_B: J2.28 Q169.2 Q202.2 TP686.1 | length 4709.5
  Top Layer w10: J2.28@2002.36,7981.5 2002.36,7970.54 1894.58,7862.76 1793.02,7862.76 1560.88,7630.62 1560.88,6300.86 1929.53,5932.22 2539.7,5932.22 2585.97,5885.95 2585.97,5170.6 2593.86,5162.71 2593.86,4963.53 2585.97,4955.65 2585.97,4855.29 2599.48,4841.78 2883.75,4841.78 2902.5,4823.04 2902.5,4814.4 ; Q169.2@2902.5,4781.5 2902.5,4814.4 ; Q202.2@3042.5,4781.5 3042.5,4806.3 3023.99,4824.81 2912.91,4824.81 2902.5,4814.4
  Bottom Layer w10: J2.28@2002.36,7981.5 2005,7981.5 TP686.1@2005,7980
PWM_INV_G1_C: J2.30 Q173.2 Q206.2 TP687.1 | length 3050
  Top Layer w10: J2.30@1902.36,7981.5 1902.36,7970 1836.57,7904.21 1777.9,7904.21 1520.88,7647.19 1520.88,6280.93 1911.81,5890 2263.23,5890 2272.5,5880.73 ; Q173.2@2272.5,5831.5 2272.5,5880.73 ; Q206.2@2412.5,5831.5 2412.5,5861.74 2388.96,5885.29 2272.5,5885.29 2272.5,5880.73
  Bottom Layer w10: TP687.1@1900,7985 1900,7981.5 J2.30@1902.36,7981.5
PWM_INV_G2_A: J2.25 Q168.2 Q201.2 TP688.1 | length 3541.4
  Top Layer w10: J2.25@2102.36,8081.5 2051.26,8030.4 2051.26,7966.76 1926.46,7841.96 1800.5,7841.96 1580.88,7622.34 1580.88,6311.17 1939.45,5952.6 2571.42,5952.6 2627.42,5896.6 2629.57,5896.6 ; Q201.2@2622.5,5831.5 2619.28,5831.5 2619.28,5879.24 2629.57,5889.53 2629.57,5896.6 ; Q168.2@2762.5,5831.5 2757.1,5831.5 2757.1,5869.93 2730.43,5896.6 2629.57,5896.6
  Bottom Layer w10: TP688.1@2100,8085 2100,8081.5 J2.25@2102.36,8081.5
PWM_INV_G2_B: J2.27 Q172.2 Q205.2 TP1597.1 | length 4659.1
  Top Layer w10: J2.27@2002.36,8081.5 1952.36,8031.5 1952.36,7967.86 1867.51,7883 1784.98,7883 1540.88,7638.9 1540.88,6289.89 1918.55,5912.22 2514.63,5912.22 2564.77,5862.07 2564.77,5379.81 2549.97,5365 v1(2549.97,5335) 2549.97,5178.32 2573.86,5154.42 2573.86,4971.82 2565.97,4963.93 2565.97,4805.55 2590.03,4781.5 Q205.2@2622.5,4781.5 2622.95,4781.5 2622.95,4806.95 2636.97,4820.98 2752.08,4820.98 2762.5,4810.56 Q172.2@2762.5,4781.5
  Bottom Layer w10: TP1597.1@2470,5335 v1(2549.97,5335)
PWM_INV_G2_C: J2.29 Q174.2 Q207.2 TP1598.1 | length 2948.7
  Top Layer w10: 1869.65,8048.78 1852.36,8031.5 1852.36,7967.86 1819.72,7935.21 1780.62,7935.21 1500.88,7655.47 1500.88,6271.97 1941.41,5831.44 1947.24,5831.44 v1(1947.24,5831.5) Q207.2@1992.5,5831.5 1992.5,5863.2 1999.3,5870 2120.87,5870 2132.5,5858.37 Q174.2@2132.5,5831.5
  Top Layer w20: 1869.65,8048.78 J2.29@1902.36,8081.5
  Bottom Layer w10: v1(1947.24,5831.5) 1958.5,5831.5 1975,5815 TP1598.1@2010,5815
PWM_INV_G3_A: J2.32 Q166.2 Q199.2 TP1599.1 | length 4108.2
  Top Layer w10: 1776.71,7959.59 1480.88,7663.76 1480.88,6263.27 1902.01,5842.14 1902.01,5303.26 1933.83,5271.44 1933.83,4870.96 1964.79,4840 2252.19,4840 2272.5,4819.69 ; Q166.2@2272.5,4781.5 2272.5,4819.69 ; Q199.2@2412.5,4781.5 2412.5,4818.43 2394.02,4836.91 v1(2387.12,4836.91) 2357.12,4836.91 2340.21,4820 2272.5,4820 2272.5,4819.69
  Top Layer w15: 1776.71,7959.59 1798.62,7981.5 J2.32@1802.36,7981.5
  Bottom Layer w10: v1(2387.12,4836.91) 2387.12,4841.54 2430.72,4841.54 2450,4860.83 TP1599.1@2450,4870
PWM_INV_G3_B: J2.34 Q170.2 Q203.2 TP1600.1 | length 2599.3
  Top Layer w10: Q170.2@1602.5,5831.5 v1@1602.5,5881.25 ; 1673.83,7938.36 1591.26,7855.78 1549.61,7855.78 1440.88,7747.05 1440.88,6240.15 1601.21,6079.83 1601.21,5883.05 v1(1602.5,5883.05) v1@1602.5,5881.25 ; Q203.2@1742.5,5831.5 1742.5,5873.15 1728.56,5887.08 1608.33,5887.08 v1@1602.5,5881.25
  Top Layer w20: 1673.83,7938.36 1702.36,7966.89 J2.34@1702.36,7981.5
  Bottom Layer w10: TP1600.1@1600,5825 1600,5880.55 v1(1602.5,5883.05)
PWM_INV_G3_C: J2.36 Q163.2 Q196.2 TP1761.1 | length 3832.4
  Top Layer w10: 1576.81,7949.26 1400.88,7773.33 1400.88,5986.84 1272.5,5858.46 1272.5,4857.1 1289.6,4840 1520.09,4840 1534.53,4825.56 1596.94,4825.56 1602.5,4820 ; Q163.2@1602.5,4781.5 1602.5,4820 ; Q196.2@1742.5,4781.5 1738.42,4781.5 1738.42,4820 1731.49,4826.93 1609.57,4826.93 1602.64,4820 1602.5,4820
  Top Layer w20: 1576.81,7949.26 1602.36,7974.81 J2.36@1602.36,7981.5
  Bottom Layer w10: J2.36@1602.36,7981.5 1603.5,7981.5 TP1761.1@1605,7980
PWM_INV_G4_A: J2.31 Q167.2 Q200.2 TP1762.1 | length 3931.6
  Top Layer w10: 1768.28,8047.41 1752.36,8031.5 1752.36,7965.1 1614.22,7826.96 1551.37,7826.96 1460.88,7736.48 1460.88,6254.98 1882.01,5833.86 1882.01,5294.1 1901.11,5275 1901.11,4821.36 1941.13,4781.34 v1(1941.13,4774.13) 1950.13,4774.13 1957.5,4781.5 Q200.2@1992.5,4781.5 1992.5,4805.92 2006.58,4820 2097.5,4820 2132.5,4785 Q167.2@2132.5,4781.5
  Top Layer w20: 1768.28,8047.41 J2.31@1802.36,8081.5
  Bottom Layer w10: TP1762.1@1800,8080 1801.5,8081.5 J2.31@1802.36,8081.5 ; v1@1941.13,4772.76 v1(1941.13,4774.13)
PWM_INV_G4_B: J2.33 Q171.2 Q204.2 TP1603.1 | length 2622.3
  Top Layer w10: Q204.2@1322.5,5831.5 1322.5,5869.85 1343.17,5890.52 1413.81,5890.52 1420.88,5897.59 ; Q171.2@1462.5,5831.5 1459.47,5831.5 v1(1459.47,5885.13) 1459.47,5890.52 1427.95,5890.52 1420.88,5897.59 ; 1673.08,8052.22 1652.36,8031.5 1652.36,7967.86 1577.84,7893.33 1555.62,7893.33 1420.88,7758.59 1420.88,5897.59
  Top Layer w20: 1673.08,8052.22 J2.33@1702.36,8081.5
  Bottom Layer w10: TP1603.1@1455,5830 1455,5880.66 v1(1459.47,5885.13)
PWM_INV_G4_C: J2.35 Q164.2 Q197.2 TP1604.1 | length 3749.2
  Top Layer w10: Q164.2@1462.5,4781.5 1462.5,4808.36 1450.86,4820 1337.48,4820 1322.5,4805.02 Q197.2@1322.5,4781.5 1283.91,4781.5 v1(1272.62,4792.79) 1269.18,4792.79 1252.5,4809.47 1252.5,5884.69 1380.88,6013.08 1380.88,7789.24 1552.36,7960.72 1552.36,8031.5 1569.97,8049.1
  Top Layer w20: 1569.97,8049.1 J2.35@1602.36,8081.5
  Bottom Layer w10: TP1604.1@1245,4755 1269.75,4779.75 1269.75,4789.92 v1(1272.62,4792.79)
REC_485_RXD: R633.2 TP801.1 U3.C12 U28.1 | length 11459.2
  Top Layer w6: U3.C12@8606.54,1102.2 8625.54,1083.2 8744.77,1083.2
  Top Layer w10: R633.2@180,1620 178.06,1620 178.06,1637.06 205,1664 U28.1@205,1720 205,1777.19 243.64,1815.83 367.43,1815.83 526.21,1657.05 526.21,1316.1 589.16,1253.15 589.16,899.73 636.29,852.6 636.29,630.9 679.44,587.75 679.44,346.51 921.07,104.88 8667.11,104.88 v1@8667.11,121.07 ; v1(8667.11,124.36) v1@8667.11,121.07 ; 8744.77,1083.2 8744.77,1082.97 8762.35,1065.39 8765.92,1065.39 8777.34,1053.98 8790,1053.98 8815.87,1053.98 8831.25,1038.59 8831.25,958.18 8881.53,907.9 8881.53,220.36 8782.24,121.07 v1@8667.11,121.07
  Bottom Layer w10: v1(8667.11,124.36) 8681.47,110 TP801.1@8720,110
REC_485_TXD: R989.1 R990.1 TP802.1 U3.A11 U28.3 | length 11234.1
  Top Layer w6: U3.A11@8685.28,1141.57 8771.02,1141.57 8771.14,1141.45
  Top Layer w10: U28.3@305,1720 305,1634.28 309.28,1630 R990.1@310,1630 ; R989.1@310,1560 R990.1@310,1630 ; 8771.14,1141.45 8774.72,1141.45 8790,1126.17 8851.43,1064.74 8851.43,995.66 v1(8888.24,958.85) 8901.7,945.38 8901.7,212.25 8774.33,84.88 912.63,84.88 656.99,340.53 656.99,580.06 610.36,626.69 610.36,848.45 569.03,889.78 569.03,1242.14 506.21,1304.96 506.21,1587.49 463.7,1630 R990.1@310,1630
  Bottom Layer w10: v1(8888.24,958.85) 8900,947.09 TP802.1@8900,890
REC_AD_ADJ1: TP700.1 U3.M1 U13.11 | length 2391.4
  Top Layer w10: U13.11@7765,3440 7765,3407.82 7785.47,3387.35 7785.47,3370.73 v1(7795.47,3370.73) 7789,3364.25 7789,3239.89 7896.12,3132.77 7896.12,2853.28 7874.53,2831.69 7874.53,2375.94 7845.86,2347.26 7845.86,1966.69 7825,1945.83 7825,1828.79 7987.67,1666.12 8183.71,1666.12 8184.83,1665 8252.2,1597.62 U3.M1@8252.2,1535.28
  Bottom Layer w10: v1(7795.47,3370.73) 7795.47,3431.19 7819.29,3455 TP700.1@7825,3455
REC_AD_ADJ2: TP701.1 U3.M2 U13.10 | length 2470.6
  Top Layer w6: 8158.26,1643.83 8180.54,1643.83 8233.2,1591.17 8233.2,1514.91 U3.M2@8252.2,1495.91
  Top Layer w10: U13.10@7715,3440 7715,3390 7723.01,3381.99 7755.47,3381.99 v1(7755.47,3374.92) 7757.21,3374.92 7757.21,3240.24 7876.12,3121.33 7876.12,2861.56 7854.26,2839.7 7854.26,2384.13 7825.86,2355.72 7825.86,1974.98 7805,1954.12 7805,1815.4 7955.4,1665 7976.06,1644.34 8157.75,1644.34 8158.26,1643.83
  Bottom Layer w10: TP701.1@7740,3465 7746.68,3465 7746.68,3374.92 v1(7755.47,3374.92)
REC_AD_CS1: R668.1 R1071.2 R1225.1 TP458.1 | length 1786.4
  Top Layer w10: v1(8041.06,3129.41) 8041.06,2669.35 8148.13,2562.29 8148.13,2264.23 8123.9,2240 R668.1@8100,2240 R1071.2@8100,2170
  Bottom Layer w10: R1225.1@7330,3220 7353.78,3220 7423.78,3150 TP458.1@7720,3150 7974.9,3150 7995.66,3129.24 8025.63,3129.24 8025.8,3129.41 v1(8041.06,3129.41)
REC_AD_CS2: R669.1 R1072.2 R1226.1 TP457.1 | length 1913
  Top Layer w10: R1072.2@8000,1870 R669.1@8000,1940 8001,1940 8034.35,1973.35 8034.35,2172.97 8051,2189.62 8051,2383.81 8016.94,2417.88 8016.94,3111.11 8007.27,3120.78 8007.27,3142.51 8036.06,3171.3 v1(8041.06,3171.3)
  Bottom Layer w10: R1226.1@7540,3220 7540,3229.8 7609,3229.8 7629.2,3250 TP457.1@7630,3250 7630,3252.22 7638.6,3252.22 7640.64,3250.19 7724.74,3250.19 7796.49,3178.45 8003.92,3178.45 8011.06,3171.3 v1(8041.06,3171.3)
REC_AD_CS3: R670.1 R1073.2 R1227.1 TP456.1 | length 1884.9
  Top Layer w10: v1(7985.95,3092.8) 7985.95,3062.8 7987.53,3061.22 7987.53,3060.9 7996.12,3052.3 7996.12,2406.91 8031,2372.03 8031,2249.35 8021.65,2240 R670.1@8000,2240 R1073.2@8000,2170
  Bottom Layer w10: R1227.1@7150,3220 7150,3185 7156.44,3178.56 7366.2,3178.56 7429.99,3114.78 7840,3114.78 TP456.1@7840,3110 7846.91,3103.09 7985.95,3103.09 v1(7985.95,3092.8)
REC_BOOT_EN: D313.1 J5.6 TP702.1 | length 10421.8
  Top Layer w10: J5.6@180,2482.36 276.42,2385.94 276.42,2210.66 167.95,2102.19 167.95,1842.53 192.57,1817.91 217.43,1817.91 238.33,1838.81 372.73,1838.81 556.1,1655.44 556.1,1314.99 611.81,1259.28 611.81,905.92 656.7,861.03 656.7,642.6 701.89,597.41 701.89,352.49 926.05,128.33 8376.52,128.33 8402.5,154.31 D313.1@8402.5,198.5
  Bottom Layer w10: TP702.1@180,2480 J5.6@180,2482.36
REC_BOOT_EN_I: Q110.3 R693.1 R1050.2 TP703.1 | length 300.3
  Top Layer w10: v1(8806.15,508.47) 8810.22,504.39 8823.39,504.39 8849,530 R693.1@8850,530 R1050.2@8850,600
  Bottom Layer w10: v1(8806.15,508.47) 8831.53,508.47 TP703.1@8860,480 Q110.3@8860,371.5
REC_CAN_RXD: R1311.1 R2721.1 TP704.1 U3.C9 | length 12435.7
  Top Layer w6: U3.C9@8606.54,1220.32 8625.54,1201.32 8789.95,1201.32
  Top Layer w10: v1(447.35,1493.24) 447.35,1485.61 463.67,1469.29 463.67,1289.94 527.01,1226.6 527.01,871.94 566.99,831.96 566.99,610.43 613.21,564.22 613.21,326.74 895.07,44.88 8790.9,44.88 8942.47,196.45 8942.47,1048.8 8790,1201.27 8789.95,1201.32 ; v1(722.06,1664.43) 731.92,1664.43 731.92,1769.72 799.47,1837.27 799.47,2446.96 700,2546.43 R1311.1@700,2590 R2721.1@770,2590
  Bottom Layer w10: v1(447.35,1493.24) 449.05,1493.24 470,1514.2 TP704.1@470,1535 520,1585 642.62,1585 v1(722.06,1664.43)
REC_CAN_TXD: R2715.1 R3012.1 TP455.1 U3.C10 | length 13974.6
  Top Layer w6: U3.C10@8606.54,1180.94 8625.54,1161.94 8781.28,1161.94 8781.28,1162.56
  Top Layer w10: v1(464.74,1586.13) 464.74,1584.43 485.3,1563.87 485.3,1296.62 547.33,1234.59 547.33,880.18 589.1,838.41 589.1,617.16 635.49,570.77 635.49,332.9 903.51,64.88 8782.62,64.88 8922.3,204.56 8922.3,1022.16 8790,1154.45 8781.89,1162.56 8781.28,1162.56 ; v1(497.17,3800.02) 496.29,3800.02 496.29,3770.15 495.8,3770.15 495.8,3754.96 453.84,3712.99 453.84,3416.49 412.53,3375.18 412.53,2753.86 459.41,2706.99 459.41,2612.7 482.12,2590 525,2590 527.5,2592.5 529.16,2590.84 R3012.1@530,2590.84 ; R3012.1@530,2590 R3012.1@530,2590.84 ; v1(641.51,1711.09) 644.81,1711.09 779.22,1845.5 779.22,2438.89 706.74,2511.38 619.46,2511.38 534.58,2596.26 530,2591.68 R3012.1@530,2590.84 ; R2715.1@750,3800 750,3751.97 v1(751.46,3750.51)
  Bottom Layer w10: v1(464.74,1586.13) 468.18,1582.68 505.5,1620 TP455.1@550,1620 550,1623.18 637.91,1711.09 v1(641.51,1711.09) ; v1(497.17,3800.02) 497.17,3796.34 715.25,3796.34 751.46,3760.13 v1(751.46,3750.51)
REC_CAN_TXD_5V: R2710.2 R3012.2 TP1866.1 U24.1 | length 1396.5
  Top Layer w10: R2710.2@550,3825 544.79,3825 544.79,3775.35 478.9,3709.45 478.9,3412.8 432.53,3366.44 432.53,2831.83 456.79,2807.57 533.54,2807.57 536.63,2804.49 U24.1@536.63,2760 536.63,2715.06 530,2708.44 R3012.2@530,2650 582.3,2597.7 582.3,2595 v1(580,2595)
REC_CPLD_CLK: R619.2 TP454.1 U3.H5 | length 2700.4
  Top Layer w10: U3.H5@8409.68,1377.8 v2(8429.37,1397.48)
  Bottom Layer w10: R619.2@6490,1680 6490,1835.12 6803.32,2148.44 7746.26,2148.44 7845.86,2048.84 7845.86,2038.93 7863.43,2021.36 7913.97,2021.36 8017.37,1917.96 8017.37,1845.13 8230,1632.5 TP454.1@8230,1515 8262.82,1482.18 8262.82,1448.22 8313.56,1397.48 v2(8429.37,1397.48)
REC_CPLD_RESET: C516.1 R1049.2 TP453.1 U3.M9 | length 1060.6
  Top Layer w10: v2(8232.52,1200.63) U3.M9@8252.2,1220.32
  Bottom Layer w10: R1049.2@7328.57,1347 C516.1@7328.57,1277 7328.57,1243.16 7353.97,1217.77 7725.19,1217.77 7727.42,1220 7869.5,1220 7874.5,1225 TP453.1@8110,1225 8111.63,1226.63 8206.52,1226.63 v2(8232.52,1200.63)
REC_CS1: Q14.3 R1468.2 TP452.1 U20.11 U119.9 U119.10 U119.11 U122.9 U122.10 U122.11 U125.10 U125.11 | length 2862.1
  Top Layer w10: U125.10@5495,3440 5495,3490 5506.79,3501.79 5535.21,3501.79 ; U125.11@5545,3440 5545,3492.47 5535.68,3501.79 5535.21,3501.79 ; v1(5775.57,3501.27) 5681.73,3501.27 5638.92,3544.08 5577.5,3544.08 5535.21,3501.79 ; v1(5927.41,3464.54) U122.9@5965,3464.54 ; U122.9@5965,3440 U122.9@5965,3464.54 ; U122.10@6015,3440 6015,3480.16 ; U122.11@6065,3440 6065,3474.81 6059.65,3480.16 6015,3480.16 ; U119.9@6525,3440 6525,3490 6535.25,3500.25 v1(6570.17,3500.25) v1@6572.71,3500.25 ; U119.10@6575,3440 6575,3490.19 6574.99,3497.98 v1@6572.71,3500.25 ; U119.11@6625,3440 6625,3489.69 6610.9,3503.79 6576.25,3503.79 v1@6572.71,3500.25 ; R1468.2@7250,3330 7250,3385 7245,3390 U20.11@7245,3440 7245,3521.41 v1(7253.75,3521.41) ; U122.9@5965,3464.54 5965,3472.54 5972.61,3480.16 6015,3480.16
  Bottom Layer w10: v1(5775.57,3501.27) 5777.93,3503.64 5815.32,3466.25 5925.7,3466.25 v1(5927.41,3464.54) 6010.04,3464.54 6023.12,3477.61 6064.07,3477.61 6126.81,3540.36 6208.62,3540.36 6273.97,3475 6528.58,3475 6553.83,3500.25 v1(6570.17,3500.25) 6572.71,3500.25 6602.65,3530.2 6673.73,3530.2 6688.43,3515.5 6737.52,3515.5 6742.02,3520 TP452.1@6780,3520 6930.6,3520 6947.57,3503.03 6972.43,3503.03 6989.4,3520 7222.34,3520 7223.75,3521.41 v1(7253.75,3521.41) 7290.85,3521.41 7300,3512.26 Q14.3@7300,3461.5
REC_CS2: Q30.3 R1436.2 TP705.1 U20.10 | length 597.7
  Top Layer w10: R1436.2@7160,3330 7160,3372.05 7195,3407.05 U20.10@7195,3440 7195,3505.08 7241.33,3551.41 7346.36,3551.41 v1(7346.36,3537.95)
  Bottom Layer w10: v1(7346.36,3537.95) 7475,3537.95 TP705.1@7475,3535 7475,3525 7479.85,3525 7490,3514.85 Q30.3@7490,3451.5
REC_CS3: Q28.3 R1401.2 TP706.1 U20.9 | length 421.9
  Top Layer w10: v1(7043.31,3461.5) 7043.31,3454.51 7080.59,3417.24 ; R1401.2@7080,3330 7080,3417.24 7080.59,3417.24 ; U20.9@7145,3440 7145,3410.14 7137.9,3417.24 7080.59,3417.24
  Bottom Layer w10: TP706.1@6950,3420 6991.5,3461.5 v1(7043.31,3461.5) Q28.3@7110,3461.5
REC_DA_CLK: TP451.1 U3.E1 U12.10 | length 1033.3
  Top Layer w6: U3.E1@8527.8,1535.28 8527.8,1606.03
  Top Layer w10: v1(8500.27,1666.36) 8500.27,1665 8500.27,1655.47 8527.8,1627.94 8527.8,1606.03 ; v1(9084.28,1895.06) 9084.28,1947.82 9085.16,1948.7 U12.10@9085.16,2008.7
  Bottom Layer w10: v1(8500.27,1666.36) 8500.27,1702.58 8552.15,1754.46 8661.44,1754.46 8746.98,1840 8915.5,1840 9025.5,1950 TP451.1@9075,1950 9082.89,1950 9082.89,1896.45 v1(9084.28,1895.06)
REC_DA_CS: TP450.1 U3.F1 U12.8 | length 1051.3
  Top Layer w10: U3.F1@8488.43,1535.28 8488.43,1556.28 8488.96,1556.81 v2(8488.96,1566.14) ; U12.8@9033.98,2008.7 9033.98,2088.87 v1(9039.61,2094.5)
  Bottom Layer w10: v2(8488.96,1566.14) 8488.96,1632.89 8470.27,1651.58 8470.27,1700.86 8544.19,1774.78 8652.94,1774.78 8753.16,1875 TP450.1@8780,1875 8917.73,1875 9039.61,1996.88 v1(9039.61,2094.5)
REC_DA_Data: TP449.1 U3.E2 U12.9 | length 900.7
  Top Layer w6: U3.E2@8527.8,1495.91 8547.73,1515.84 8547.73,1665 8547.73,1665.11 ; v1(9042.12,1919.24) 9059.57,1936.68 U12.9@9059.57,2008.7
  Top Layer w10: v1(8547.2,1707.08) 8547.73,1707.08 8547.73,1665.11
  Bottom Layer w10: v1(8547.2,1707.08) 8574.26,1734.15 8671.29,1734.15 8757.15,1820 8945,1820 TP449.1@9000,1875 9042.12,1917.12 v1(9042.12,1919.24)
REC_DISPLAY: C219.1 D33.3 R1.1 R905.2 TP448.1 | length 447.1
  Bottom Layer w10: C219.1@4910,2540 4940,2540 ; R1.1@4940,2160 4940,2205 4935,2210 TP448.1@4935,2245 4937.5,2245 4937.5,2431.5 D33.3@4940,2431.5 4940,2540 ; R905.2@4970,2540 4940,2540
REC_DS_A: R1082.1 TP733.1 U3.F15 | length 420
  Top Layer w6: U3.F15@8488.43,984.09 8507.43,965.09 8507.43,889.39 8511.59,885.23 8511.59,878.03
  Top Layer w10: 8511.59,878.03 8511.59,835 8511.59,746.19 8546.39,711.39 v1@8553.61,711.39 ; v1(8559.56,711.39) v1@8553.61,711.39 ; R1082.1@8570,660 8570,695 v1@8553.61,711.39
  Bottom Layer w10: v1(8559.56,711.39) 8564.29,711.39 8585,732.1 TP733.1@8585,750
REC_DS_B: R1095.1 TP734.1 U3.G15 | length 534.1
  Top Layer w6: U3.G15@8449.06,984.09 8468.06,965.09 8468.06,898.86 8468.21,898.7
  Top Layer w10: R1095.1@8360,660 8360,683.78 8384.83,708.61 v1(8434.2,708.61) 8434.2,714.33 8468.21,748.35 8468.21,835 8468.21,898.7
  Bottom Layer w10: v1(8434.2,708.61) 8438.6,708.61 8438.6,738.61 TP734.1@8505,805
REC_DSP_1_GB1: C838.1 C839.1 R1974.1 TP41.1 TP717.1 U3.A5 | length 2921.5
  Top Layer w6: U3.A5@8685.28,1377.8 8783.95,1377.8 8784.97,1376.78
  Top Layer w10: 8784.97,1376.78 8790,1376.78 8798.65,1376.78 8952.87,1531 9268.07,1531 9377.37,1640.3 9377.37,2400.31 9522.9,2545.84 10135.84,2545.84 TP41.1@10210,2620 R1974.1@10210,2740 10210,2809 10200,2819 C839.1@10200,2850 C838.1@10200,2950
  Bottom Layer w10: TP41.1@10210,2620 10210,2665 10215,2670 TP717.1@10215,2720
REC_DSP_1_GB1z: Q106.3 R2204.1 TP465.1 | length 416.5
  Top Layer w10: R2204.1@9950,3490 9950,3425.65 v1(9965.62,3410.03) ; v1(10100.8,3278.83) 10138.13,3241.5 Q106.3@10170,3241.5
  Bottom Layer w10: v1(9965.62,3410.03) 9969.38,3410.03 10100.58,3278.83 v1(10100.8,3278.83) 10116.97,3295 TP465.1@10150,3295
REC_DSP_1_GB2: C840.1 C841.1 R1983.1 TP56.1 TP464.1 U3.C5 | length 2555.7
  Top Layer w6: U3.C5@8606.54,1377.8 8626.22,1397.48 v2(8627,1397.48)
  Top Layer w10: v1(9322.3,1755.18) 9322.3,1785.18 9337.37,1800.24 9337.37,2419.91 9537.46,2620 TP56.1@9890,2620 9890,2621.2 9910,2641.2 R1983.1@9910,2740 9910,2809 9900,2819 C840.1@9900,2850 C841.1@9900,2950
  Bottom Layer w10: v2(8627,1397.48) 8812.19,1397.48 8889.73,1475.02 8889.73,1534.23 8933,1577.5 9002,1577.5 9179.5,1755 TP464.1@9260,1755 9301.61,1755 9301.79,1755.18 v1(9322.3,1755.18)
REC_DSP_1_GB2z: Q108.3 R1136.1 TP718.1 | length 1247.4
  Top Layer w10: Q108.3@9870,3241.5 9870,3279.53 9890.72,3300.25 v1(9890.46,3300.52) 9890.46,3304.46 9935.1,3349.11 10392.82,3349.11 10497.5,3453.79 10497.5,3688.46 10380,3805.96 R1136.1@10380,3840
  Bottom Layer w10: TP718.1@9875,3235 9875,3285.06 v1(9890.46,3300.52)
REC_DSP_1_GB3: C834.1 C835.1 R1980.1 TP719.1 U3.B4 | length 2224.7
  Top Layer w6: U3.B4@8645.91,1417.17 8664.91,1436.17 8693.2,1436.17 8693.67,1435.7 8744.55,1435.7
  Top Layer w10: 8744.55,1435.7 8778.37,1435.7 8790,1447.33 8937.67,1595 9247.21,1595 9265.92,1613.7 9265.92,1680.24 9212.22,1733.94 9212.22,1818.58 9277.37,1883.73 9277.37,2465.21 9455,2642.84 v1(9455,2672.42) 9460,2677.42 R1980.1@9460,2740 9460,2809 9450,2819 C835.1@9450,2850 C834.1@9450,2950
  Bottom Layer w10: v1(9455,2672.42) TP719.1@9455,2730
REC_DSP_1_GB3z: Q97.3 R2205.1 TP720.1 | length 375.3
  Top Layer w10: R2205.1@9320,3490 9320,3329.07 v1(9372.24,3276.83) 9410.34,3276.83 9420,3267.17 Q97.3@9420,3241.5
  Bottom Layer w10: v1(9372.24,3276.83) 9383.17,3276.83 TP720.1@9420,3240
REC_DSP_1_GH1: C836.1 C837.1 R1973.1 TP40.1 TP721.1 U3.B5 | length 2818.6
  Top Layer w6: U3.B5@8645.91,1377.8 8664.91,1396.8 8771.7,1396.8
  Top Layer w10: 8771.7,1396.78 8790,1396.78 8790.36,1396.78 8944.58,1551 9259.78,1551 9357.37,1648.59 9357.37,2408.96 9514.25,2565.84 9995.84,2565.84 TP40.1@10050,2620 10050,2692.5 10060,2702.5 R1973.1@10060,2740 10060,2809 10050,2819 C836.1@10050,2850 C837.1@10050,2950
  Bottom Layer w10: TP40.1@10050,2620 10050,2672.5 10065,2687.5 TP721.1@10065,2730
REC_DSP_1_GH1z: Q100.3 R2201.1 TP722.1 | length 1088.6
  Top Layer w10: Q100.3@10020,3241.5 10020,3288.02 v1(10026.05,3294.07) 10026.05,3296.6 10058.56,3329.11 10401.1,3329.11 10517.5,3445.5 10517.5,3741.51 10470,3789.01 R2201.1@10470,3840
  Bottom Layer w10: TP722.1@10015,3235 10015,3283.02 v1(10026.05,3294.07)
REC_DSP_1_GH2: C842.1 C843.1 R1978.1 TP723.1 U3.A4 | length 2449.6
  Top Layer w6: U3.A4@8685.28,1417.17 8785.29,1417.17 8790,1421.87 8939.13,1571 8948.54,1571
  Top Layer w10: 8948.54,1571 9251.5,1571 9292.3,1611.81 9292.3,1787.3 9317.37,1812.37 9317.37,2433.16 9525.51,2641.3 9727.83,2641.3 9760,2673.46 R1978.1@9760,2740 9760,2809 9750,2819 C842.1@9750,2850 C843.1@9750,2950 9751.5,2950 9783.73,2982.23 v1(9792.85,2982.23)
  Bottom Layer w10: TP723.1@9755,2950 9787.23,2982.23 v1(9792.85,2982.23)
REC_DSP_1_GH2z: Q107.3 R2202.1 TP724.1 | length 933.8
  Top Layer w10: Q107.3@9720,3241.5 9769.87,3241.5 v1(9781.73,3253.37) 9901.66,3373.29 10388.65,3373.29 10460,3444.64 R2202.1@10460,3480
  Bottom Layer w10: TP724.1@9715,3235 9763.37,3235 v1(9781.73,3253.37)
REC_DSP_1_GH3: C832.1 C833.1 R1979.1 TP725.1 U3.D1 | length 1649.9
  Top Layer w6: U3.D1@8567.17,1535.28 8567.17,1612.84
  Top Layer w10: 8567.17,1612.84 8567.17,1635.12 8576.45,1644.41 8576.45,1665 8576.45,1684.93 8577.2,1685.67 8577.2,1732.8 8541.61,1768.39 8541.61,2098.72 8579,2136.11 8579,2324.59 8644.52,2390.11 8644.52,2652.98 8560,2737.5 R1979.1@8560,2740 8560,2809 8550,2819 C832.1@8550,2850 C833.1@8550,2950 8550,2981.8 8568.29,3000.09 v1(8591.38,3000.09)
  Bottom Layer w10: TP725.1@8570,3045 8591.38,3023.62 v1(8591.38,3000.09)
REC_DSP_1_GH3z: Q96.3 R2203.1 TP463.1 | length 1914.6
  Top Layer w10: Q96.3@8520,3241.5 8520,3245 8554.89,3279.89 v1(8561.98,3279.89) ; v1(9793.41,3308.69) 9907.5,3422.78 9907.5,3699.53 9850,3757.03 R2203.1@9850,3840
  Bottom Layer w10: v1(8561.98,3279.89) 8588.91,3306.83 9396.67,3306.83 9403.5,3300 9466.82,3300 9474.39,3307.57 9625,3307.57 TP463.1@9625,3310 9793.41,3310 v1(9793.41,3308.69)
REC_DSP_2_GB1: C448.1 C482.1 R939.1 TP462.1 U3.C4 | length 2190
  Top Layer w6: U3.C4@8606.54,1417.17 v2(8626.24,1436.85)
  Top Layer w10: v1(9276.07,1820.92) 9276.07,1850.92 9297.37,1872.22 9297.37,2443.25 9515.48,2661.36 9569.07,2661.36 9610,2702.29 R939.1@9610,2740 9610,2809 9600,2819 C482.1@9600,2850 C448.1@9600,2950
  Bottom Layer w10: v2(8626.24,1436.85) 8652.24,1436.85 8663.98,1425.1 8810.17,1425.1 8869.15,1484.08 8869.15,1543.64 8998.33,1672.83 8998.33,1682.43 9070.9,1755 TP462.1@9120,1755 9185.92,1820.92 v1(9276.07,1820.92)
REC_DSP_2_GB1z: Q56.3 R1119.1 TP726.1 | length 1046
  Top Layer w10: v1(9501.73,3270.15) 9530.38,3241.5 Q56.3@9570,3241.5 9570,3292.62 9632.31,3354.93 9798.41,3354.93 9887.5,3444.01 9887.5,3682.85 9760,3810.35 R1119.1@9760,3840
  Bottom Layer w10: v1(9501.73,3270.15) 9544.85,3270.15 TP726.1@9575,3240
REC_DSP_2_GB2: C449.1 C483.1 R940.1 TP437.1 U3.C3 | length 1923.9
  Top Layer w10: U3.C3@8606.54,1456.54 v2(8626.22,1476.22) ; C483.1@9150,2950 C449.1@9150,2850 9150,2819 9160,2809 R940.1@9160,2740 9160,2674.84 9237.37,2597.47 9237.37,1914.45 v1(9199.13,1876.2)
  Bottom Layer w10: v2(8626.22,1476.22) 8626.22,1512.99 8697.46,1584.23 8876.44,1584.23 8948.5,1656.29 8948.5,1673.5 9115,1840 TP437.1@9150,1840 9186.2,1876.2 v1(9199.13,1876.2)
REC_DSP_2_GB2z: Q50.3 R1125.1 TP436.1 | length 674.3
  Top Layer w10: R1125.1@8690,3490 8690,3419.1 8720.73,3388.37 v1(8720.73,3387.23) ; Q50.3@9120,3241.5 9120,3350.74 v1(9136.22,3366.96)
  Bottom Layer w10: v1(8720.73,3387.23) 8742.95,3365 TP436.1@8940,3365 9136.22,3365 v1(9136.22,3366.96)
REC_DSP_2_GB3: C450.1 C484.1 R941.1 TP727.1 U3.C2 | length 2066
  Top Layer w6: U3.C2@8606.54,1495.91 8626.91,1516.28 8626.91,1554.67 8627.45,1555.22
  Top Layer w10: 8627.45,1555.22 8687.34,1615.1 8790,1615.1 8824.67,1615.1 8949.57,1740 8992.21,1740 9197.37,1945.16 9197.37,2472.84 8978.6,2691.61 v1(8860,2691.61) R941.1@8860,2740 8860,2809 8850,2819 C450.1@8850,2850 C484.1@8850,2950
  Bottom Layer w10: v1(8860,2691.61) TP727.1@8860,2740
REC_DSP_2_GB3z: Q51.3 R1126.1 TP728.1 | length 1016.6
  Top Layer w10: Q51.3@8820,3241.5 8851.02,3241.5 8875.78,3266.26 v1(8875.78,3274.46) 9018.27,3416.96 9156.93,3416.96 9168.33,3405.56 9193.18,3405.56 9247.5,3459.88 9247.5,3727.6 9160,3815.1 R1126.1@9160,3840
  Bottom Layer w10: TP728.1@8820,3245 8849.46,3274.46 v1(8875.78,3274.46)
REC_DSP_2_GH1: C445.1 C479.1 R936.1 TP435.1 U3.D3 | length 1627.9
  Top Layer w10: U3.D3@8567.17,1456.54 v2(8586.85,1476.22) ; C479.1@8700,2950 C445.1@8700,2850 8700,2819 8710,2809 R936.1@8710,2740 8710,2737.5 8665,2692.5 8665,2368.55 8686.14,2347.41 8686.14,1896.27 8709.32,1873.08 8709.32,1713.66 8735.04,1687.95 8735.04,1665 v1(8735.04,1657.95)
  Bottom Layer w10: v2(8586.85,1476.22) 8585,1478.07 TP435.1@8585,1520 8592.87,1527.87 8612.59,1527.87 8735.04,1650.33 v1(8735.04,1657.95)
REC_DSP_2_GH1z: Q55.3 R1118.1 TP434.1 | length 1377.4
  Top Layer w10: Q55.3@8670,3241.5 v1(8670,3337.83) ; v1(9802.22,3401.16) 9850,3448.94 R1118.1@9850,3490
  Bottom Layer w10: v1(8670,3337.83) 8670,3330 9430,3330 TP434.1@9430,3335 9600.5,3335 9645.45,3379.95 9781.01,3379.95 v1(9802.22,3401.16)
REC_DSP_2_GH2: C446.1 C480.1 R937.1 TP729.1 U3.B1 | length 1910.5
  Top Layer w10: U3.B1@8645.91,1535.28 8703.49,1592.86 8790,1592.86 8830.71,1592.86 8957.85,1720 9000.5,1720 9217.37,1936.87 9217.37,2505.16 v1(9037.38,2685.15) 9026.67,2685.15 9010,2701.81 R937.1@9010,2740 9010,2809 9000,2819 C446.1@9000,2850 C480.1@9000,2950
  Bottom Layer w10: TP729.1@9005,2735 9037.38,2702.62 v1(9037.38,2685.15)
REC_DSP_2_GH2z: Q49.3 R1124.1 TP730.1 | length 909
  Top Layer w10: Q49.3@8970,3241.5 9010.17,3241.5 9023.38,3254.71 v1(9023.38,3268) 9023.38,3325.85 9094.49,3396.96 9148.64,3396.96 9160.04,3385.56 9201.46,3385.56 9269.39,3453.49 9269.39,3734.36 9240,3763.75 R1124.1@9240,3840
  Bottom Layer w10: TP730.1@8965,3235 8998,3268 v1(9023.38,3268)
REC_DSP_2_GH3: C447.1 C481.1 R938.1 TP731.1 U3.A2 | length 1898
  Top Layer w10: U3.A2@8685.28,1495.91 8703.27,1513.9 8780.03,1513.9 8790,1523.86 8966.14,1700 9065.35,1700 9257.37,1892.02 9257.37,2659.15 9273.67,2675.45 v1(9305,2675.45) 9310,2680.45 R938.1@9310,2740 9310,2809 9300,2819 C481.1@9300,2850 C447.1@9300,2950
  Bottom Layer w10: v1(9305,2675.45) TP731.1@9305,2735
REC_DSP_2_GH3z: Q52.3 R1127.1 TP732.1 | length 324.4
  Top Layer w10: v1(9180.75,3435.56) 9190.56,3435.56 9210,3455 R1127.1@9210,3490 ; Q52.3@9270,3241.5 v1(9270,3380.89)
  Bottom Layer w10: v1(9180.75,3435.56) 9180.75,3434.25 TP732.1@9220,3395 9255.89,3395 v1(9270,3380.89)
REC_DSP_CLK: R622.2 TP707.1 U1.90 | length 338.4
  Top Layer w9: 6589.49,1515 6593.86,1519.37 U1.90@6685.12,1519.37
  Top Layer w10: v1(6539.06,1450.93) 6539.06,1464.58 6589.49,1515
  Bottom Layer w10: TP707.1@6400,1470 6401.53,1470 6431.53,1440 R622.2@6490,1440 6527.5,1440 6538.43,1450.93 v1(6539.06,1450.93)
REC_DSP_IR1+: C1077.2 D31.3 R12.1 R933.2 TP447.1 | length 493.3
  Bottom Layer w10: R12.1@5800,2160 5782.5,2160 5782.5,2210.2 5775.13,2217.57 5775.13,2242.43 5775.25,2242.55 5775.25,2270.25 TP447.1@5800,2295 D31.3@5800,2431.5 5800,2477.5 5770,2507.5 R933.2@5770,2540 C1077.2@5840,2540
REC_DSP_IR1-: C7.1 D9.3 R8.1 R908.1 TP708.1 | length 520.2
  Top Layer w10: R908.1@5610,2540 C7.1@5670,2540 5670,2538.5 5642.5,2511 5642.5,2480 5640,2477.5 D9.3@5640,2431.5 5640,2337.14 5640.31,2336.84 v1(5640.31,2306.84) 5640.31,2160 R8.1@5650,2160
  Bottom Layer w10: v1(5640.31,2306.84) 5642.17,2304.97 5642.17,2302.83 5655,2290 TP708.1@5655,2255
REC_DSP_IR2+/VBUS_P: C11.2 D32.3 R9.1 R928.1 TP468.1 | length 631.6
  Bottom Layer w10: R928.1@6090,2540 6114.25,2540 6119.59,2534.66 ; R9.1@6120,2160 6164.12,2160 6186.4,2182.28 6186.4,2230 TP468.1@6190,2230 6235.92,2275.92 6235.92,2409.92 6214.34,2431.5 D32.3@6120,2431.5 6120,2435 6119.59,2435.41 6119.59,2534.66 ; C11.2@6160,2540 6119.59,2540 6119.59,2534.66
REC_DSP_IR2-/VBUS_N: C6.1 D37.3 R5.1 R930.2 TP709.1 | length 580.2
  Top Layer w10: C6.1@5380,2540 R930.2@5320,2540 5320,2510 5340,2490 D37.3@5340,2431.5 R5.1@5340,2160 5410,2160 v1(5410,2173.45)
  Bottom Layer w10: TP709.1@5410,2125 v1(5410,2173.45)